# EAGLE board wroom32 (EAGLE 9.6.2)
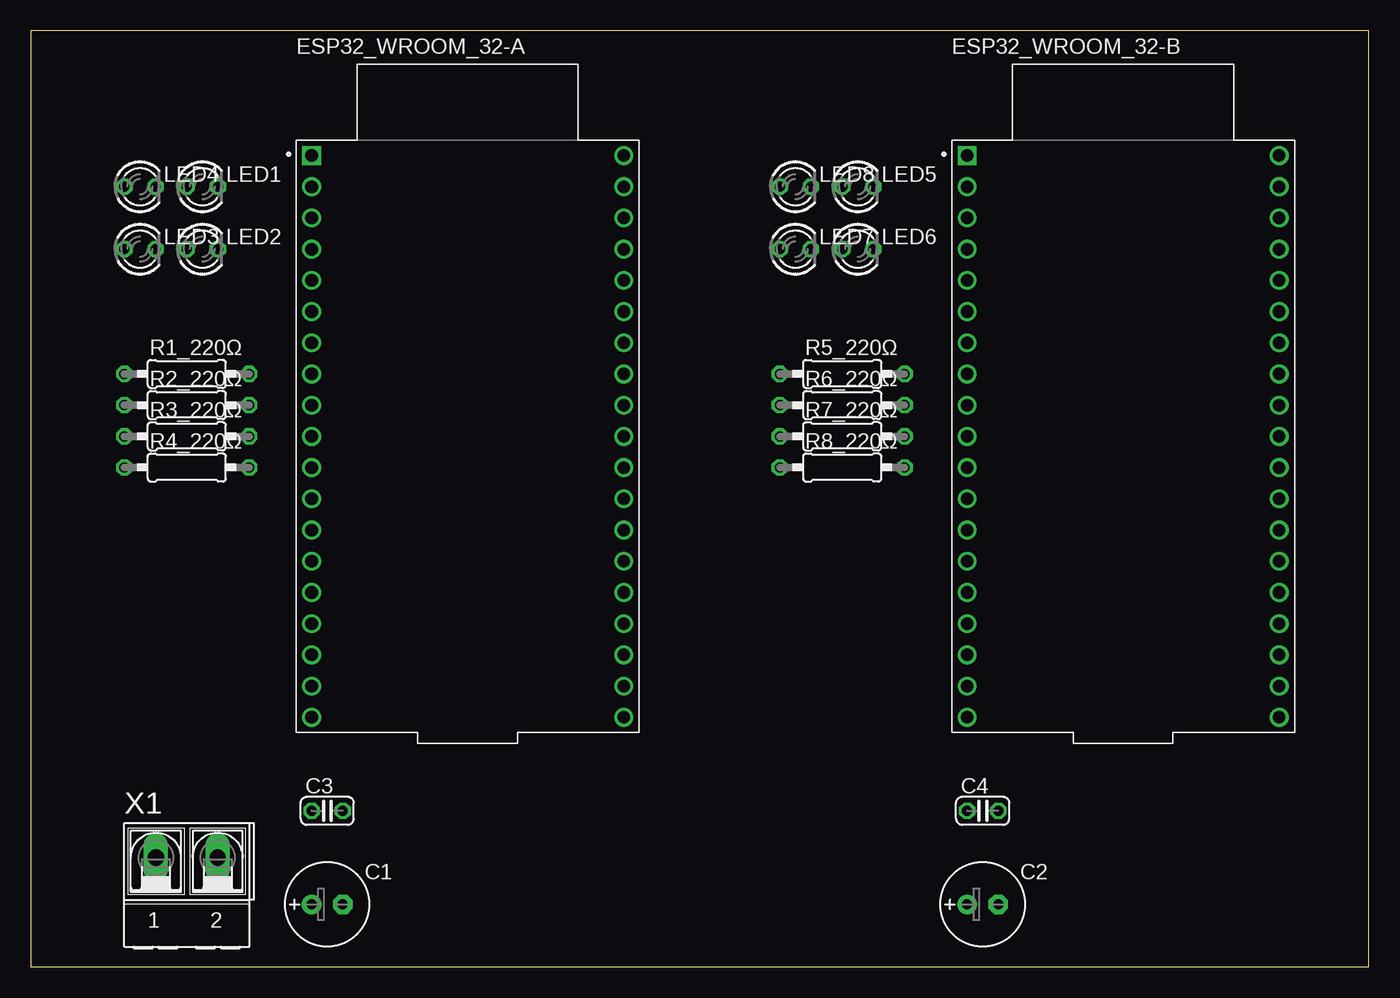
[diagram p0: board, top side]
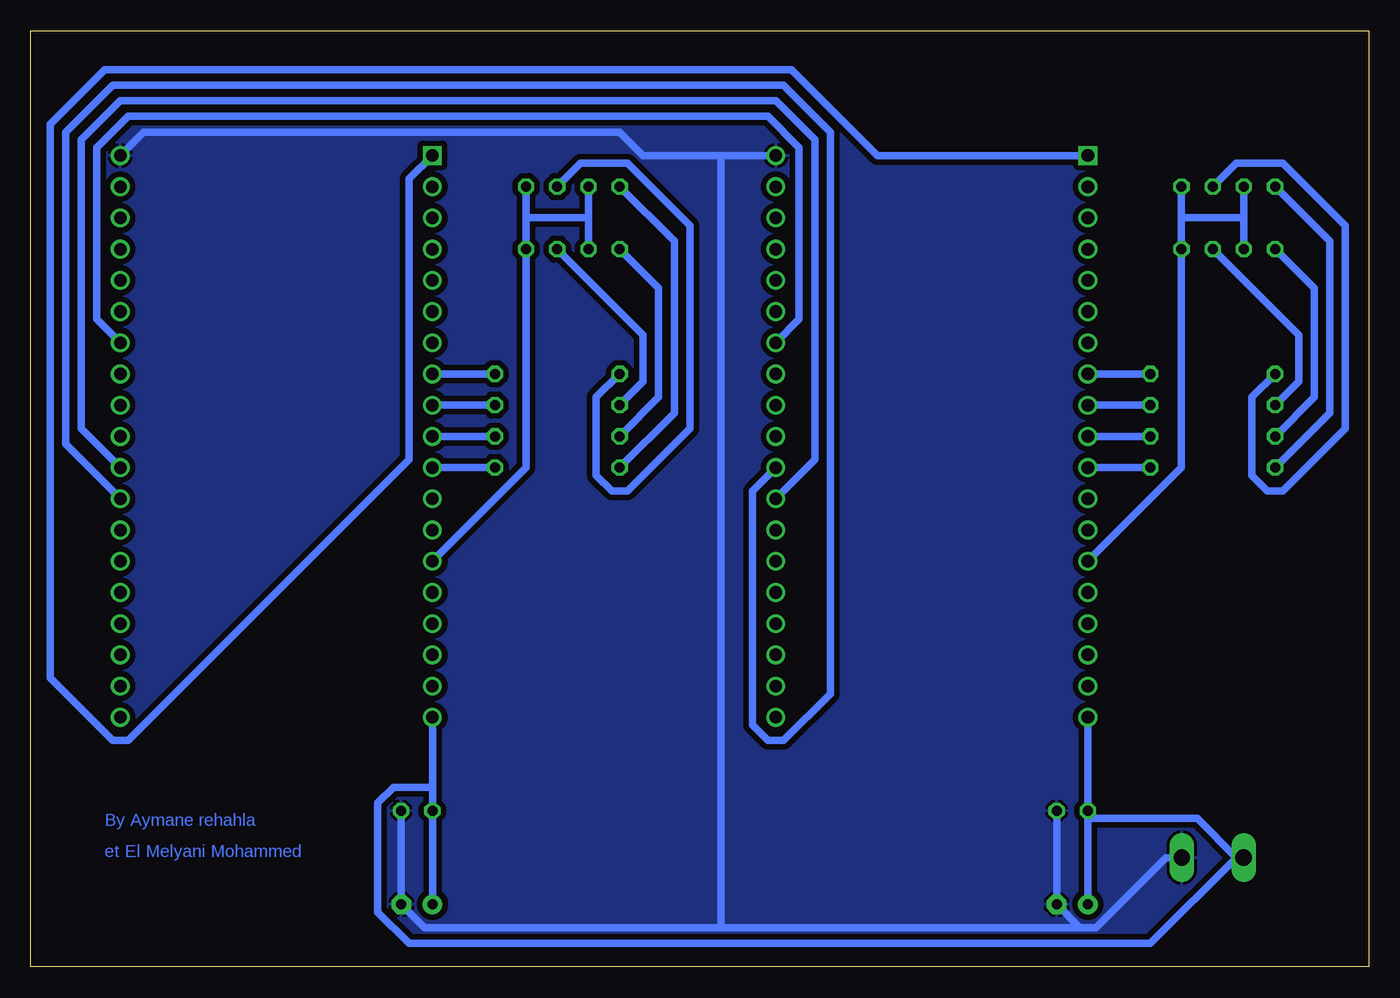
[diagram p1: board, bottom side, seen from below]

Size 108.89 x 76.19 mm. Coordinates in mm from the lower left corner, seen from the top.
Outline: 0,0 108.89,0 108.89,76.19 0,76.19 0,0
Copper layers (1*16): Top 0.035mm / dielectric 1.5mm / Bottom 0.035mm
Design rules "default *": minimum track width 24mil, minimum drill 0.35mm, track to track 18mil, track to pad 18mil, pad to pad 6mil, via to via 6mil, smd to smd 6mil, copper to edge 40mil, drill to drill 6mil, minimum pad ring 10mil, minimum via ring 8mil, stop-mask expansion 4mil, vias tented up to drill 0mil, thermal gap 10mil

## Footprints (pad centres in the part's own frame; a part is rotated, then mirrored left to right if it is on the bottom)
E2,5-7 = drill 0.813 pad 1.6: + -1.27,0 | drill 0.813 pad 1.6 octagon: - 1.27,0
C025-024X044 = drill 0.813 octagon: 1 -1.27,0; 2 1.27,0
MODULE_DEVKIT_V1_ESP32-WROOM-32 = drill 1.02 square: 1 -12.7,22.85 | drill 1.02: 2 -12.7,20.31; 3 -12.7,17.77; 4 -12.7,15.23; 5 -12.7,12.69; 6 -12.7,10.15; 7 -12.7,7.61; 8 -12.7,5.07; 9 -12.7,2.53; 10 -12.7,-0.01; 11 -12.7,-2.55; 12 -12.7,-5.09; 13 -12.7,-7.63; 14 -12.7,-10.17; 15 -12.7,-12.71; 16 -12.7,-15.25; 17 -12.7,-17.79; 18 -12.7,-20.33; 19 -12.7,-22.87; 20 12.7,-22.87; 21 12.7,-20.33; 22 12.7,-17.79; 23 12.7,-15.25; 24 12.7,-12.71; 25 12.7,-10.17; 26 12.7,-7.63; 27 12.7,-5.09; 28 12.7,-2.55; 29 12.7,-0.01; 30 12.7,2.53; 31 12.7,5.07; 32 12.7,7.61; 33 12.7,10.15; 34 12.7,12.69; 35 12.7,15.23; 36 12.7,17.77; 37 12.7,20.31; 38 12.7,22.85
LED3MM = drill 0.813 octagon: A -1.27,0; K 1.27,0
0207/10 = drill 0.813 octagon: 1 -5.08,0; 2 5.08,0
AK500/2-H = drill 1.321 long: 1 -2.515,0; 2 2.515,0

## Placement (x,y rotation side)
C1  470uF  [E2,5-7]  24.13,5.08 0 top
C2  470uF  [E2,5-7]  77.47,5.08 0 top
C3  100nF  [C025-024X044]  24.13,12.7 0 top
C4  100nF  [C025-024X044]  77.47,12.7 0 top
ESP32_WROOM_32-A  DEVKIT_V1_ESP32-WROOM-32  [MODULE_DEVKIT_V1_ESP32-WROOM-32]  35.56,43.18 0 top
ESP32_WROOM_32-B  DEVKIT_V1_ESP32-WROOM-32  [MODULE_DEVKIT_V1_ESP32-WROOM-32]  88.9,43.18 0 top
LED1  TLLG4400  [LED3MM]  13.97,63.5 0 top
LED2  TLLG4400  [LED3MM]  13.97,58.42 0 top
LED3  TLLG4400  [LED3MM]  8.89,58.42 0 top
LED4  TLLG4400  [LED3MM]  8.89,63.5 0 top
LED5  TLLG4400  [LED3MM]  67.31,63.5 0 top
LED6  TLLG4400  [LED3MM]  67.31,58.42 0 top
LED7  TLLG4400  [LED3MM]  62.23,58.42 0 top
LED8  TLLG4400  [LED3MM]  62.23,63.5 0 top
R1_220Ω  [0207/10]  12.7,48.26 0 top
R2_220Ω  [0207/10]  12.7,45.72 0 top
R3_220Ω  [0207/10]  12.7,43.18 0 top
R4_220Ω  [0207/10]  12.7,40.64 0 top
R5_220Ω  [0207/10]  66.04,48.26 0 top
R6_220Ω  [0207/10]  66.04,45.72 0 top
R7_220Ω  [0207/10]  66.04,43.18 0 top
R8_220Ω  [0207/10]  66.04,40.64 0 top
X1  [AK500/2-H]  12.7,8.89 0 top

## Library data of the parts
C1-C4 = rcl; SPICEPREFIX: C
ESP32_WROOM_32-A ESP32_WROOM_32-B = DEVKIT_V1_ESP32-WROOM-32 (1); AVAILABILITY: Not in stock; CHECK_PRICES: https://www.snapeda.com/parts/DEVKIT%20V1%20ESP32-WROOM-32/Espressif+Systems/view-part/?ref=eda; DESCRIPTION: WROOM-32 Development Board ESP32 ESP-32S WiFi Bluetooth Dev Module; MF: Espressif Systems; MP: DEVKIT V1 ESP32-WROOM-32; PACKAGE: Package; PRICE: None; SNAPEDA_LINK: https://www.snapeda.com/parts/DEVKIT%20V1%20ESP32-WROOM-32/Espressif+Systems/view-part/?ref=snap
LED1-LED8 = led; MF: VISHAY SEMICONDUCTOR; OC_FARNELL: 1612435
R1_220Ω R2_220Ω R3_220Ω R4_220Ω R5_220Ω R6_220Ω R7_220Ω R8_220Ω = rcl; SPICEPREFIX: R
X1 = con-ptr500; OC_FARNELL: unknown; OC_NEWARK: unknown

## Nets
3V3: ESP32_WROOM_32-A.1 ESP32_WROOM_32-B.1
GND: C1.- C2.- C3.2 C4.2 ESP32_WROOM_32-A.38 ESP32_WROOM_32-B.38 X1.2
GND2: ESP32_WROOM_32-A.32 ESP32_WROOM_32-B.32
N$1: ESP32_WROOM_32-A.28 ESP32_WROOM_32-B.27
N$2: ESP32_WROOM_32-A.27 ESP32_WROOM_32-B.28
N$3: ESP32_WROOM_32-B.14 LED5.K LED6.K LED7.K LED8.K
N$4: ESP32_WROOM_32-A.14 LED1.K LED2.K LED3.K LED4.K
N$5: LED1.A R1_220Ω.1
N$6: LED2.A R2_220Ω.1
N$7: LED3.A R3_220Ω.1
N$8: LED4.A R4_220Ω.1
N$9: ESP32_WROOM_32-A.11 R4_220Ω.2
N$10: ESP32_WROOM_32-A.10 R3_220Ω.2
N$11: ESP32_WROOM_32-A.9 R2_220Ω.2
N$12: ESP32_WROOM_32-A.8 R1_220Ω.2
N$13: ESP32_WROOM_32-B.8 R5_220Ω.2
N$14: ESP32_WROOM_32-B.9 R6_220Ω.2
N$15: ESP32_WROOM_32-B.10 R7_220Ω.2
N$16: ESP32_WROOM_32-B.11 R8_220Ω.2
N$17: LED8.A R8_220Ω.1
N$18: LED7.A R7_220Ω.1
N$19: LED6.A R6_220Ω.1
N$20: LED5.A R5_220Ω.1
VCC: C1.+ C2.+ C3.1 C4.1 ESP32_WROOM_32-A.19 ESP32_WROOM_32-B.19 X1.1

## Tracks (layer width: path | path; a pad name or v marks a point on that pad's centre or on a via)
3V3
  Bottom 0.61: ESP32_WROOM_32-A.1 40.01,66.04 46.99,73.03 102.87,73.03 107.31,68.58 107.31,23.5 102.23,18.42 100.97,18.42 78.11,41.28 78.11,64.14 ESP32_WROOM_32-B.1
GND
  Bottom 0.61: 52.7,66.04 59.05,66.04 60.96,67.95 99.69,67.95 ESP32_WROOM_32-B.38 | 52.7,66.04 ESP32_WROOM_32-A.38 | C4.2 C2.- 76.83,3.18 52.7,3.18 | C3.2 C1.- 23.49,3.18 | X1.2 16.51,8.89 22.22,3.18 23.49,3.18 | 23.49,3.18 52.7,3.18 | 52.7,3.18 52.7,66.04
  pour Bottom: 0,76.2 109.22,76.2 109.22,0 0,0
GND2
  Bottom 0.61: ESP32_WROOM_32-A.32 46.35,52.7 46.35,66.67 48.89,69.22 100.97,69.22 103.5,66.67 103.5,52.7 ESP32_WROOM_32-B.32
N$1
  Bottom 0.61: ESP32_WROOM_32-B.27 106.05,42.55 106.05,67.95 102.23,71.75 47.62,71.75 43.81,67.95 43.81,22.23 47.62,18.42 48.89,18.42 50.16,19.69 50.16,38.73 ESP32_WROOM_32-A.28
N$2
  Bottom 0.61: ESP32_WROOM_32-A.27 45.09,41.28 45.09,67.31 48.26,70.48 101.6,70.48 104.78,67.31 104.78,43.81 ESP32_WROOM_32-B.28
N$3
  Bottom 0.61: LED8.K 63.5,60.96 | 63.5,60.96 LED7.K | LED5.K 68.58,60.96 | 68.58,60.96 LED6.K 68.58,40.64 ESP32_WROOM_32-B.14 | 68.58,60.96 63.5,60.96
N$4
  Bottom 0.61: LED4.K 10.16,60.96 | 10.16,60.96 LED3.K | LED1.K 15.24,60.96 | 15.24,60.96 LED2.K 15.24,40.64 ESP32_WROOM_32-A.14 | 15.24,60.96 10.16,60.96
N$5
  Bottom 0.61: R1_220Ω.1 9.52,46.36 9.52,40.01 8.25,38.73 6.98,38.73 1.9,43.81 1.9,60.33 6.98,65.41 10.79,65.41 LED1.A
N$6
  Bottom 0.61: R2_220Ω.1 5.71,47.62 5.71,51.44 LED2.A
N$7
  Bottom 0.61: R3_220Ω.1 4.45,46.36 4.45,55.25 LED3.A
N$8
  Bottom 0.61: R4_220Ω.1 3.17,45.09 3.17,59.06 LED4.A
N$9
  Bottom 0.61: R4_220Ω.2 ESP32_WROOM_32-A.11
N$10
  Bottom 0.61: R3_220Ω.2 ESP32_WROOM_32-A.10
N$11
  Bottom 0.61: R2_220Ω.2 ESP32_WROOM_32-A.9
N$12
  Bottom 0.61: R1_220Ω.2 ESP32_WROOM_32-A.8
N$13
  Bottom 0.61: R5_220Ω.2 ESP32_WROOM_32-B.8
N$14
  Bottom 0.61: R6_220Ω.2 ESP32_WROOM_32-B.9
N$15
  Bottom 0.61: R7_220Ω.2 ESP32_WROOM_32-B.10
N$16
  Bottom 0.61: R8_220Ω.2 ESP32_WROOM_32-B.11
N$17
  Bottom 0.61: R8_220Ω.1 56.52,45.09 56.52,59.06 LED8.A
N$18
  Bottom 0.61: R7_220Ω.1 57.78,46.36 57.78,55.25 LED7.A
N$19
  Bottom 0.61: R6_220Ω.1 59.05,47.62 59.05,51.44 LED6.A
N$20
  Bottom 0.61: R5_220Ω.1 62.86,46.36 62.86,40.01 61.59,38.73 60.33,38.73 55.25,43.81 55.25,60.33 60.33,65.41 64.14,65.41 LED5.A
VCC
  Bottom 0.61: ESP32_WROOM_32-B.19 76.2,14.61 | 76.2,14.61 C4.1 C2.+ | ESP32_WROOM_32-A.19 C3.1 22.86,12.07 | 22.86,12.07 C1.+ | 10.79,8.89 13.97,12.07 22.86,12.07 | 76.2,14.61 79.38,14.61 80.64,13.34 80.64,4.45 78.11,1.91 17.78,1.91 10.79,8.89 | 10.79,8.89 X1.1

## Text on the board
Bottom: By Aymane rehahla | et El Melyani Mohammed